# Altium PCB BSPZ.PcbDoc
Units mm, origin at the board's own origin, x right, y up, seen from the top; angles counter-clockwise.
Board outline 100.2 x 50.29 mm, 2 copper layers (Top Layer, Bottom Layer), stack 1.569 mm thick; 60 components, 42 nets, 248 pads, 0 vias.
Unrouted connection lines stored in the file: 151.
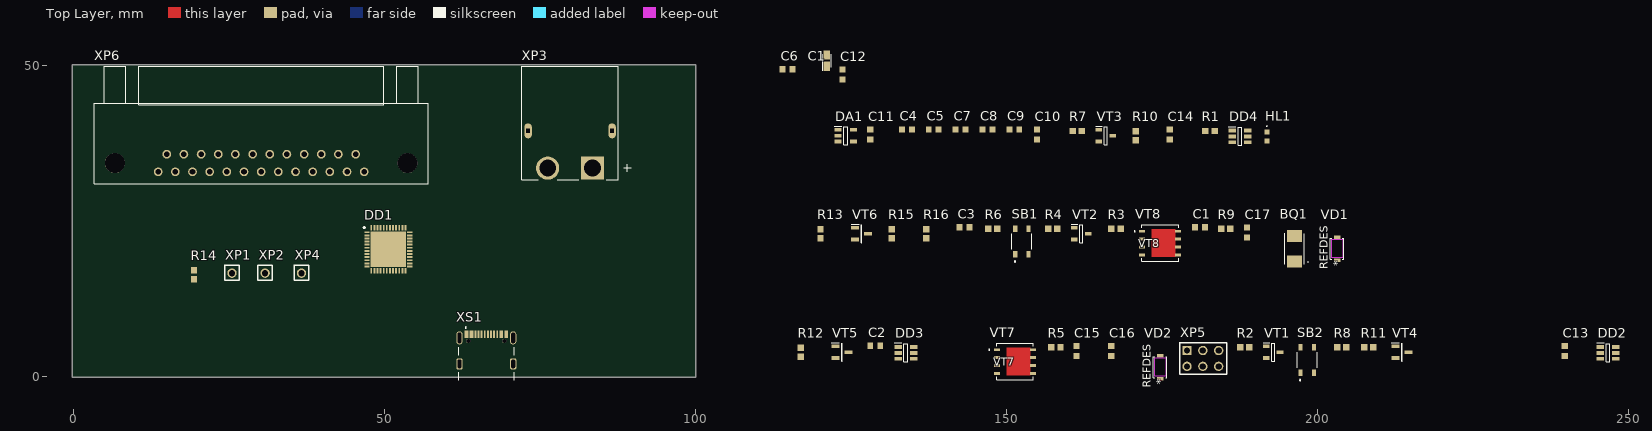
[diagram p0: Top Layer view]
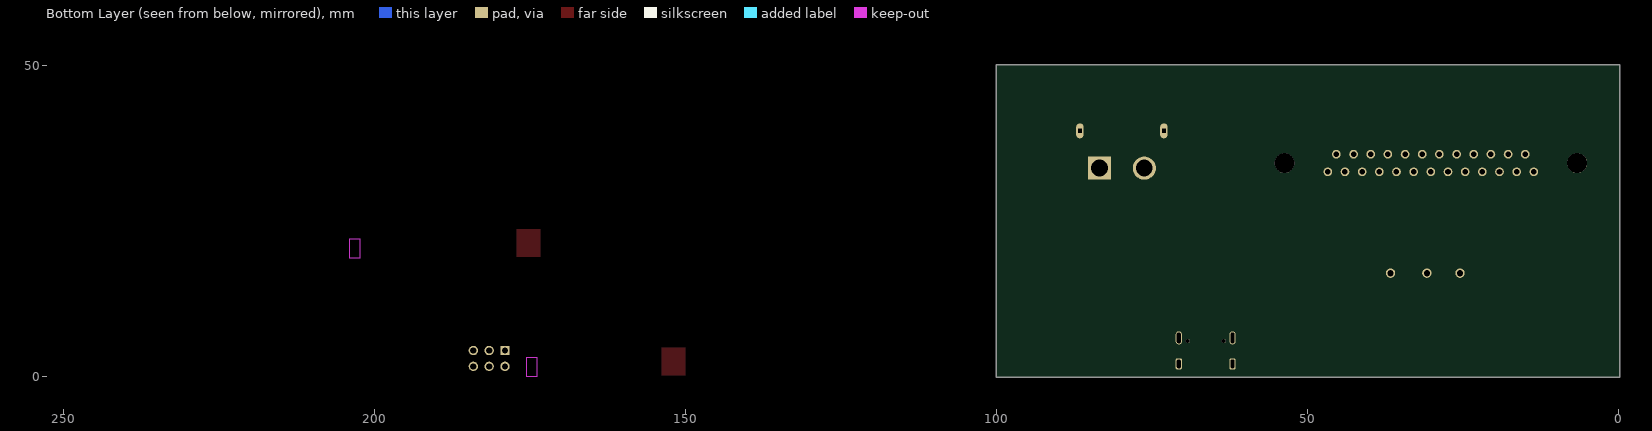
[diagram p1: Bottom Layer view, seen from below]

## Layer stack, top to bottom
Top Solder: solder mask 0.0254, SM-001, Dk 4
Top Layer: signal copper 0.035
Dielectric 1: core 1.4986, Core-043, Dk 4.3
Bottom Layer: signal copper 0.035
Bottom Solder: solder mask 0.0254, SM-001, Dk 4

## Board outline
-0.037,-0.122 cw(c0,0) -0.127,0 -0.127,50 cw(c0,50) -0.127,50.01 cw(c0,50.019) 0,50.146 99.949,50.146 cw(c99.949,50.019) 100.076,50.019 100.076,-0.019 cw(c99.949,-0.019) 99.949,-0.146 0.038,-0.146 cw(c0.038,-0.019)

## Design rules (kind name [scope] priority, off if disabled: settings)
Clearance [All] p1: gap=0.254 ignorepadtopadclearanceinfootprint=FALSE except(0: Arc-Hole Track-Hole SMDPad-Hole THPad-Hole Via-Hole Fill-Hole Poly-Hole Region-Hole Text-Hole)
PolygonConnect [All] p1: connectstyle=Relief reliefconductorwidth=0.254 reliefentries=4 polygonreliefangle="90 Angle" airgapwidth=0.254
RoutingVias [All] p1: holewidth=0.711 width=1.27 viastyle="Through Hole" minholewidth=0.711 minwidth=1.27 maxholewidth=0.711 maxwidth=1.27
SolderMaskExpansion [All] p1: expansion=0.102 istentingtop=FALSE
Width [All] p1: maxlimit=0.254 minlimit=0.254 preferedwidth=0.254
30 further rules are at their usual default settings.

## Components (designator, comment, footprint, x,y, rotation, side; value= is the part's Value field where it differs from the comment)
BQ1 "ABM3-8.000MHZ-D2Y-T" ABM3-25.000MHz 196.342,20.555 r90 top
C1 "0603-12pF-50V-NPO-5%" C0603 180.34,23.984 r0 top
C2 "0603-12pF-50V-NPO-5%" C0603 128.143,4.934 r0 top
C3 "0603-100pF-50V-5%" C0603 142.494,23.984 r0 top
C4 "0603-0.1uF-50V-5%" C0603 133.223,39.732 r0 top
C5 "0603-0.1uF-50V-5%" C0603 137.541,39.732 r0 top
C6 "0603-0.1uF-50V-5%" C0603 114.046,49.384 r0 top
C7 "0603-0.1uF-50V-5%" C0603 141.859,39.732 r0 top
C8 "0603-0.1uF-50V-5%" C0603 146.177,39.732 r0 top
C9 "0603-0.1uF-50V-5%" C0603 150.495,39.732 r0 top
C10 "0603-0.1uF-50V-5%" C0603 154.94,38.081 r90 top
C11 "0603-0.1uF-50V-5%" C0603 128.143,38.081 r90 top
C12 "0603-0.1uF-50V-5%" C0603 123.698,47.733 r90 top
C13 "0603-0.1uF-50V-5%" C0603 239.776,3.283 r90 top
C14 "0603-0.1uF-50V-5%" C0603 176.276,38.081 r90 top
C15 "0603-10uF-25V-20% X5R" C0603 161.29,3.283 r90 top
C16 "0603-10uF-25V-20% X5R" C0603 166.878,3.283 r90 top
C17 "0603-0.1uF-50V-5%" C0603 188.722,22.333 r90 top
DA1 "SPX3819M5-L-3-3TR" SOT95P280x145-5N 124.206,38.716 r0 top
DD1 "STM32G474CEU6" QFN50P700X700X60-49N-D 50.673,20.447 r0 top
DD2 "SN74LVC2G17DBVR" SOT95P280x145-6N 246.761,3.791 r0 top
DD3 "SN74LVC2G17DBVR" SOT95P280x145-6N 133.858,3.791 r0 top
DD4 "SN74LVC2G17DBVR" SOT95P280x145-6N 187.579,38.589 r0 top
HL1 "FYLS-0603UBC" LED0603 191.897,38.589 r90 top
R1 "0603-2.2kOhm-5%" Res0603 182.753,39.478 r0 top
R2 "0603-5.1KOhm-5%" Res0603 188.341,4.68 r0 top
R3 "0603-20Ohm-5%" Res0603 167.64,23.73 r0 top
R4 "0603-20Ohm-5%" Res0603 157.48,23.73 r0 top
R5 "0603-5.1KOhm-5%" Res0603 157.988,4.68 r0 top
R6 "0603-5.1KOhm-5%" Res0603 147.828,23.73 r0 top
R7 "0603-5.1KOhm-5%" Res0603 161.417,39.478 r0 top
R8 "0603-5.1KOhm-5%" Res0603 203.962,4.68 r0 top
R9 "0603-5.1KOhm-5%" Res0603 185.293,23.73 r0 top
R10 "0603-5.1KOhm-5%" Res0603 170.815,38.716 r90 top
R11 "0603-5.1KOhm-5%" Res0603 208.28,4.68 r0 top
R12 "0603-5.1KOhm-5%" Res0603 116.967,3.918 r90 top
R13 "0603-5.1KOhm-5%" Res0603 120.142,22.968 r90 top
R14 "0603-5.1KOhm-5%" Res0603 19.431,16.364 r90 top
R15 "0603-5.1KOhm-5%" Res0603 131.572,22.968 r90 top
R16 "0603-5.1KOhm-5%" Res0603 137.16,22.968 r90 top
SB1 "SKRPABE010" SKRPABE010 152.527,21.698 r90 top
SB2 "SKRPABE010" SKRPABE010 198.374,2.648 r90 top
VD1 "SM5819PL-TP" "SM5819PL-TP (SOD123)" 203.2,18.142 r90 top
VD2 "SM5819PL-TP" "SM5819PL-TP (SOD123)" 174.752,-0.908 r90 top
VT1 "IRLML6244TRPBF" SOT95P230x110-3N 192.913,3.918 r0 top
VT2 "IRLML6244TRPBF" SOT95P230x110-3N 162.052,22.968 r0 top
VT3 "IRLML6244TRPBF" SOT95P230x110-3N 165.989,38.716 r0 top
VT4 "IRLML2244TRPBF" SOT95P237x112-3N 213.614,3.918 r0 top
VT5 "IRLML2244TRPBF" SOT95P237x112-3N 123.571,3.918 r0 top
VT6 "IRLML2244TRPBF" SOT95P237x112-3N 126.746,22.968 r0 top
VT7 "AON6414A" "8-DFN (5x6)" 147.955,1.759 r0 top
VT8 "AON6414A" "8-DFN (5x6)" 171.323,20.809 r0 top
XP1 "PLS-1" PLS-1 25.527,16.618 r0 top
XP2 "PLS-1" PLS-1 30.861,16.618 r0 top
XP3 "XT60PW-M" XT60PW-M 79.883,39.497 r180 top
XP4 "PLS-1" PLS-1 36.703,16.618 r0 top
XP5 "PLD-6" PLD-6 179.07,4.172 r0 top
XP6 "DRB-25FA" ID25P33E4GV00LF 30.226,43.815 r0 top
XS1 "USB4105-GF-A" GCT_USB4105-GF-A 66.421,2.032 r0 top
С1 "TAJR105K025RNJ" TAJR105K025RNJ 121.158,50.781 r90 top

## Footprints (in the part's own frame and the unit in brackets; to place one, negate y for a bottom-side part, rotate by r counter-clockwise, add the part's x,y. Pads: shape width x height; smd on the part's side, far side on the other; paste and mask are expansions set on the pad)
"8-DFN (5x6)" [mm]
  rect 0.96x0.458 smd paste+0 mask+0: 1(0.536,2.54) 2(0.536,1.27) 3(0.536,0) 4(0.536,-1.27) 5(6.322,-1.27) 6(6.322,0) 7(6.322,1.27) 8(6.322,2.54)
  Top Layer region: 5.867,-1.587 5.867,2.857 2.108,2.857 2.108,-1.587
  silkscreen extent -0.76,-2.29 6.38,3.56, body extent 0.36,-2.16 6.5,3.43, height 0.99
ABM3-25.000MHz [mm]
  rect 1.9x2.4 smd: 1(-2.05,0) 2(2.05,0)
  silkscreen extent -2.5,-2.25 2.5,1.6, body extent -2.5,-1.6 2.5,1.6, height 1.3
C0603 [mm]
  rect 0.95x1 smd: 1(0,0) 2(1.6,0)
  body extent -0.02,-0.42 1.58,0.38, height 0.9
GCT_USB4105-GF-A [mm]
  rect 0.6x1.15 smd: A1_B12(-3.2,4.755) A4_B9(-2.4,4.755) B1_A12(3.2,4.755) B4_A9(2.4,4.755)
  rect 0.3x1.15 smd: A5(-1.25,4.755) A6(-0.25,4.755) A7(0.25,4.755) A8(1.25,4.755) B5(1.75,4.755) B6(0.75,4.755) B7(-0.75,4.755) B8(-1.75,4.755)
  oval 1x2.1 hole 0.6 slot 1.7 at 90 deg: SH1(-4.32,4.18) SH2(4.32,4.18)
  rrect50% 1x1.8 hole 0.6 slot 1.4 at 90 deg: SH3(-4.32,0) SH4(4.32,0)
  round 0.65 hole 0.65 unplated: ""(-2.89,3.68) ""(2.89,3.68)
  silkscreen extent -4.47,-2.6 4.47,5.94, body extent -4.47,-2.67 4.47,5.03, height 3.26
ID25P33E4GV00LF [mil]
  round 55 / inner round 60 / far side round 55 hole 35 paste-27.5 mask+0: 1(651.97,-429.92) 2(543.31,-429.92) 3(434.65,-429.92) 4(325.98,-429.92) 5(217.32,-429.92) 6(108.66,-429.92) 7(0,-429.92) 8(-108.66,-429.92) 9(-217.32,-429.92) 10(-325.98,-429.92) 11(-434.65,-429.92) 12(-543.31,-429.92) 13(-651.97,-429.92) 14(597.64,-318.11) 15(488.98,-318.11) 16(380.31,-318.11) 17(271.65,-318.11) 18(162.99,-318.11) 19(54.33,-318.11) 20(-54.33,-318.11) 21(-162.99,-318.11) 22(-271.65,-318.11) 23(-380.31,-318.11) 24(-488.98,-318.11) 25(-597.64,-318.11)
  round 126 / inner round 60 / far side round 126 hole 126 unplated paste-63 mask-63: 26(-925.98,-374.02) 27(925.98,-374.02)
  silkscreen extent -1056,-506 1056,239, body extent -1040,-495 1050,237, height 444
LED0603 [mm]
  rect 0.8x0.8 smd: 1(0.75,0) 2(-0.75,0)
  silkscreen extent 1.6,-0.05 1.7,0.05, body extent -0.8,-0.4 0.8,0.4, height 0.8
PLD-6 [mm]
  rect 1.5x1.5 hole 1: 1(0,0)
  round 1.5 hole 1: 2(0,-2.54) 3(2.54,0) 4(2.54,-2.54) 5(5.08,0) 6(5.08,-2.54)
  silkscreen extent -1.17,-3.83 6.38,1.27, body extent -1.27,-3.81 6.35,1.27, height 8.55
PLS-1 [mm]
  round 1.5 hole 1: 1(0,0)
  silkscreen extent -1.17,-1.14 1.14,1.27, body extent -1.27,-1.25 1.27,1.25, height 8.55
QFN50P700X700X60-49N-D [mm]
  rect 0.85x0.3 smd: 1(-3.45,2.75) 2(-3.45,2.25) 3(-3.45,1.75) 4(-3.45,1.25) 5(-3.45,0.75) 6(-3.45,0.25) 7(-3.45,-0.25) 8(-3.45,-0.75) 9(-3.45,-1.25) 10(-3.45,-1.75) 11(-3.45,-2.25) 12(-3.45,-2.75) 25(3.45,-2.75) 26(3.45,-2.25) 27(3.45,-1.75) 28(3.45,-1.25) 29(3.45,-0.75) 30(3.45,-0.25) 31(3.45,0.25) 32(3.45,0.75) 33(3.45,1.25) 34(3.45,1.75) 35(3.45,2.25) 36(3.45,2.75)
  rect 0.3x0.85 smd: 13(-2.75,-3.45) 14(-2.25,-3.45) 15(-1.75,-3.45) 16(-1.25,-3.45) 17(-0.75,-3.45) 18(-0.25,-3.45) 19(0.25,-3.45) 20(0.75,-3.45) 21(1.25,-3.45) 22(1.75,-3.45) 23(2.25,-3.45) 24(2.75,-3.45) 37(2.75,3.45) 38(2.25,3.45) 39(1.75,3.45) 40(1.25,3.45) 41(0.75,3.45) 42(0.25,3.45) 43(-0.25,3.45) 44(-0.75,3.45) 45(-1.25,3.45) 46(-1.75,3.45) 47(-2.25,3.45) 48(-2.75,3.45)
  rect 5.7x5.7 smd: 49(0,0)
  silkscreen extent -4,3.38 -3.75,3.62, body extent -3.55,-3.55 3.55,3.55, height 0.6
Res0603 [mm]
  rect 1.04x1.02 smd: 1(-0.735,0) 2(0.735,0)
  body extent -0.8,-0.4 0.8,0.4, height 0.55
SKRPABE010 [mm]
  rect 1.05x0.65 smd: 1(-2.075,1.075) 2(2.075,1.075) 3(-2.075,-1.075) 4(2.075,-1.075)
  silkscreen extent -3.32,-1.6 1.23,1.6, body extent -2.3,-1.6 2.3,1.6, height 2.5
"SM5819PL-TP (SOD123)" [mil]
  rect 23x41 smd paste+0 mask+0: 1(22.5,0) 2(167.5,0)
  Top Layer keep-out region: 36,-35.5 36,35.5 154,35.5 154,-35.5
  Keep-Out Layer region: 36,-35.5 36,35.5 154,35.5 154,-35.5
  silkscreen extent 29,-42 161,43, body extent 19,-37 171,37, height 75
SOT95P230x110-3N [mm]
  rect 1.05x0.6 smd: 1(-1.1,0.95) 2(-1.1,-0.95) 3(1.1,0)
  silkscreen extent -1.63,-1.45 0.23,1.5, body extent -1.14,-1.45 1.26,1.45, height 0.89
SOT95P237x112-3N [mm]
  rect 1.3x0.6 smd: 1(-1.05,0.95) 2(-1.05,-0.95) 3(1.05,0)
  silkscreen extent -1.7,-1.46 0.05,1.5, body extent -1.45,-1.52 1.19,1.52, height 1.12
SOT95P280x145-5N [mm]
  rect 1.15x0.6 smd: 1(-1.25,0.95) 2(-1.25,0) 3(-1.25,-0.95) 4(1.25,-0.95) 5(1.25,0.95)
  silkscreen extent -1.83,-1.45 0.33,1.5, body extent -1.4,-1.45 1.4,1.45, height 1.45
SOT95P280x145-6N [mm]
  rect 1.2x0.6 smd: 1(-1.25,0.95) 2(-1.25,0) 3(-1.25,-0.95) 4(1.25,-0.95) 5(1.25,0) 6(1.25,0.95)
  silkscreen extent -1.85,-1.45 0.3,1.6, body extent -1.4,-1.45 1.4,1.45, height 1.45
TAJR105K025RNJ [mm]
  rect 1.5x1.05 smd: 1(-0.9,0) 2(0.9,0)
  silkscreen extent -1.65,-0.67 1.02,0.67, body extent -1.02,-0.67 1.03,0.68, height 1.2
XT60PW-M [mm]
  rect 3.716x3.716 / inner round 3.716 / far side rect 3.716x3.716 hole 2.7 mask+0.102: 1(-3.6,6)
  round 3.716 hole 2.7 mask+0.102: 2(3.6,6)
  oval 1.2x2.4 hole 0.6 square mask+0.102: SH1(-6.75,0) SH2(6.75,0)
  silkscreen extent -9.8,-10.35 7.75,7.85, body extent -7.75,-10.35 7.75,7.85, height 8.4

## Part data
BQ1: library part ABM3-25.000MHz, "ABM3-8.000MHZ-D2Y-T Кварцевий резонатор Космодром код товару: 00-00066552 Виробник:ABRACON"
C1 C2: library part CAP0603, "Чіп кераміка (0603) 12pf (NP0) 50v ± 5% / SMD-конденсатор 0603"
C3: library part CAP0603, "Чіп кераміка (0603) 100pf (NP0) 50v ± 5% / SMD-конденсатор / Конденсатор керамический, SMD 0603, номинальная емкость: 100pF, номинальное напряжение: 50V, точность +/-5% CL10C101JB8NNNC /  / Тип корпуса: CAP0603 / Производитель: SAMSUNG / код товара: 00-00034408"
C4 C5 C6 C7 C8 C9 C10 C11 C12: library part CAP0603, "Чіп кераміка (0603) 0,1mkf (X7R) 50v ±10% / SMD-конденсатор 0603 / Конденсатор керамический, SMD 0603, номинальная емкость: 100nF, номинальное напряжение: 50V, точность +/-10% CL10B104KB8NNNC /  / Тип корпуса: CAP0603 / Производитель: SAMSUNG / код товара: 00-00052755"
C13 C14 C17: library part CAP0603, "Чіп кераміка (0603) 0,1mkf (X7R) 50v ±10% / SMD-конденсатор 0603 / Конденсатор керамический, SMD 0603, номинальная емкость: 100nF, номинальное напряжение: 50V, точность +/-10% CL10B104KB8NNNC /  / Тип корпуса: CAP0603 / Производитель: SAMSUNG / Космодром код товара: 00-00052755"
C15 C16: library part CAP0603, "Чіп кераміка (0603) 10mkf (X5R) 25v 20% / SMD-конденсатор / CL10A106MA8NRNC 10 uF, 25 VDC, X5R, 20 % /  / Тип корпуса: CAP0603 / Производитель: SAMSUNG / Космодром код товара: 00-00076287"
DD2 DD3 DD4: "SN74LVC2G17DBVR / Микросхема серии 74LVC / Буфер, триггер Шмитта, 1.65В до 5.5В, SOT-23-6 /  / Тип корпуса: SOT23-6 / Производитель: TI / Космодром код товара: 00-00023488"
HL1: library part LED0603, "FYLS-0603UBC / Светодиод SMD / Светодиод 0603. Синий ,120mcd 130°, 468nm. 3,3 В. 20 мА. /  / Производитель: FORYARD / код товара: 00-00055962"
R1: library part Res0603, "SMD-резистор (0603) 2,2 kom ±5% / SMD-резистор 0603 / SMD-резистор 0603, Номинальная мощность: 0,1 Вт, Номинальное сопротивление: 2,2 кОм, Допустимое отклонение +/- 5% RC0603JR-072K2L /  / Тип корпуса: RC0603 / Производитель: YAGEO / код товара: 00-00033888"
R2 R5 R6 R7 R8 R9 R10 R11 R12 R13 R14 R15 R16: library part Res0603, "SMD-резистор (0603) 5,1 kom ±5% / SMD-резистор 0603 / SMD-резистор 0603, Номинальная мощность: 0,1 Вт, Номинальное сопротивление: 5,1 кОм, Допустимое отклонение +/- 5% RC0603JR-075K1L /  / Тип корпуса: RC0603 / Производитель: YAGEO / код товара: 00-00033897"
R3 R4: library part Res0603, "SMD-резистор (0603) 20 om ±5% / SMD-резистор 0603 / SMD-резистор 0603, Номинальная мощность: 0,1 Вт, Номинальное сопротивление: 20 Ом, Допустимое отклонение +/- 5% /  / Тип корпуса: RC0603 / Производитель: Faithful Link / код товара: 00-00033844 / Тип корпуса: RC0603 / Производитель: YAGEO / код товара: 00-00033897 / Тип корпуса: RC0603 / Производитель: YAGEO / код товара: 00-00033885"
VD1 VD2: "SM5819PL / Imrad Артикул: 195754 / Производитель: MCC / Корпус: SOD-123"
VT1 VT2 VT3: library part IRLML6244, "IRLML6244TRPBF / Транзистор полевой MOSFET / 20V Single N-Channel HEXFET Power MOSFET in a Micro 3 package /  / Тип корпуса: SOT23-3 / Производитель: INFIN / Космодром код товара: 00-00032383"
VT4 VT5 VT6: library part IRLML2244, "IRLML2244TRPBF / Транзистор полевой MOSFET / MOSFET P-CH 20V 4.3A SOT23 /  / Тип корпуса: SOT23-3 / Производитель: INFIN / Космодром код товара: 00-00032376"
VT7 VT8: "AON6414A / Транзистор полевой MOSFET / MOSFET, 31 W, 0.008 Ohm /  / Тип корпуса: DFN-8(5x6) / Производитель: AOS / Космодром код товара: 00-00072394"
XP3: "XT60PW-M / Разъем питания / Разъем питания XT60 угловой (папа).Ток до 60А. Цвет: желтый /  / Производитель: AMASS / Космодром код товара: 00-00061016"
XP6: library part ID25P33E4GV00LF, "DRB-25FA / Imrad Артикул: 201625 / Назва виробника: DS1037-25FNAKT74-0CC / Виробник: CONNFLY"

## Nets (pads, with @x,y where several pads share a name; then routed paths per layer and width w, separated by ;. In a path a pad name is that pad's centre, name@x,y a point inside that pad or via, vN(x,y) a via of type N, cw(c..) or ccw(c..) an arc to the next point about the centre after c; other vN are vias at no path point)
3.3V: C4.2 C5.2 C7.2 C8.2 C9.2 C10.2 C12.2 C13.1 C14.1 C15.1 C16.1 C17.1 DA1.5 DD1.1 DD1.20 DD1.21 DD1.23 DD1.35 DD1.48 DD2.5 DD3.5 DD4.5 R14.2 R15.2 R16.2 SB2.1 SB2.2 XP5.1 XP6.10 XP6.12
12V: C6.2 DA1.1 DA1.3 R8.2 R9.2 R10.2 VD1.1 VD2.1 VT4.2 VT5.2 VT6.2 XP3.1 XP6.6 XP6.8 С1.1
BOOT: DD1.46 R2.2 SB2.3 SB2.4
ElClapDrain: DD1.27 DD3.3
ElClapFuel: DD1.28 DD3.1
"Fueling On/Off": DD1.45 DD2.6
FullCentralTank: DD1.8 R5.2 VT1.1
FullCentralTankLed: R11.1 XP6.2
FullLeftTank: DD1.12 R7.2 VT3.1
FullLeftTankLed: R13.1 XP6.4
FullRightTank: DD1.9 R6.2 VT2.1
FullRightTankLed: R12.1 XP6.3
GND: C1.2 C2.2 C3.1 C4.1 C5.1 C6.1 C7.1 C8.1 C9.1 C10.1 C11.1 C12.1 C13.2 C14.2 C15.2 C16.2 C17.2 DA1.2 DD1.49 DD2.2 DD3.2 DD4.2 R1.1 R2.1 R5.1 R6.1 R7.1 SB1.1 SB1.2 VT1.2 VT2.2 VT3.2 VT7.1 VT7.2 VT7.3 VT8.1 VT8.2 VT8.3 XP3.2 XP4.1 XP5.6 XP6.23 XP6.25 XS1.A1_B12 XS1.B1_A12 XS1.SH1 XS1.SH2 XS1.SH3 XS1.SH4 С1.2
LeftSensIn: DD1.44 DD4.6
LeftSensor: DD4.1 R15.1 XP6.22
NetBQ1_1: BQ1.1 C1.1 DD1.6
NetBQ1_2: BQ1.2 C2.1 DD1.5
NetC3_2: C3.2 DD1.7 SB1.3 SB1.4 XP5.2
NetC11_2: C11.2 DA1.4
NetDD1_22: DD1.22 HL1.2
NetDD1_33: DD1.33 R4.1
NetDD1_34: DD1.34 R3.1
NetDD1_36: DD1.36 XP5.4
NetDD1_37: DD1.37 XP5.3
NetDD2_1: DD2.1 R14.1 XP6.1
NetDD3_4: DD3.4 VT8.4
NetDD3_6: DD3.6 VT7.4
NetHL1_1: HL1.1 R1.2
NetR8_1: R8.1 VT1.3 VT4.1
NetR9_1: R9.1 VT2.3 VT5.1
NetR10_1: R10.1 VT3.3 VT6.1
NetR11_2: R11.2 VT4.3
NetR12_2: R12.2 VT5.3
NetR13_2: R13.2 VT6.3
NetVD1_2: VD1.2 VT8.5 VT8.6 VT8.7 VT8.8 XP6.20
NetVD2_2: VD2.2 VT7.5 VT7.6 VT7.7 VT7.8 XP6.18
RightSensIn: DD1.43 DD4.4
RightSensor: DD4.3 R16.1 XP6.24
"UART RX": DD1.32 XP1.1
"UART TX": DD1.31 XP2.1
"USB DN": R4.2 XS1.A7 XS1.B7
"USB DP": R3.2 XS1.A6 XS1.B6
pads on no net: DD1.2 DD1.3 DD1.4 DD1.10 DD1.11 DD1.13 DD1.14 DD1.15 DD1.16 DD1.17 DD1.18 DD1.19 DD1.24 DD1.25 DD1.26 DD1.29 DD1.30 DD1.38 DD1.39 DD1.40 DD1.41 DD1.42 DD1.47 DD2.3 DD2.4 XP3.SH1 XP3.SH2 XP5.5 XP6.5 XP6.7 XP6.9 XP6.11 XP6.13 XP6.14 XP6.15 XP6.16 XP6.17 XP6.19 XP6.21 XP6.26 XP6.27 XS1. XS1.A4_B9 XS1.A5 XS1.A8 XS1.B4_A9 XS1.B5 XS1.B8

## Silkscreen, mask and mechanical layers (free items; w line width, h text height)
Board:
  lines w0.254: 0,0 0,50 ; 0,50.019 99.949,50.019 99.949,-0.019 0.038,-0.019

## Text inside footprints (layer, text, board x,y; h text height)
VD1: Top Overlay "*" at 203.835,17.723 h1.27 r90; Top Overlay "REFDES" at 201.676,17.253 h1.27 r90; Mechanical 13 "*" at 203.835,18.942 h1.27 r90
VD2: Top Overlay "*" at 175.387,-1.327 h1.27 r90; Top Overlay "REFDES" at 173.228,-1.797 h1.27 r90; Mechanical 13 "*" at 175.387,-0.108 h1.27 r90